# EAGLE board CarteMere_V2 (EAGLE 8.4.0)
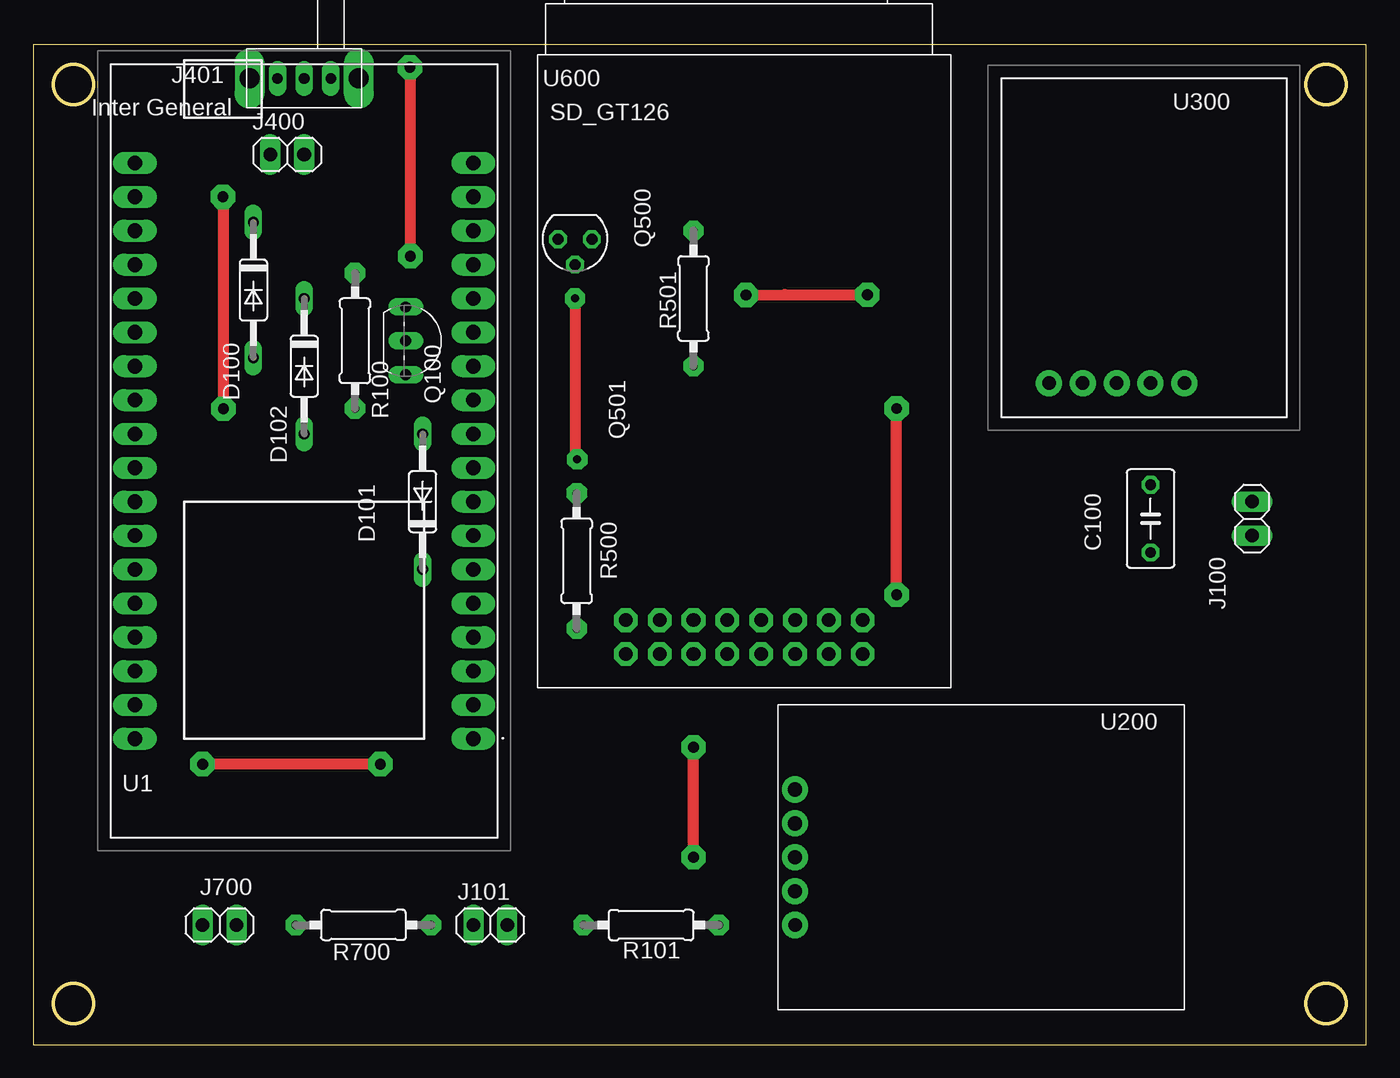
[diagram p0: board, top side]
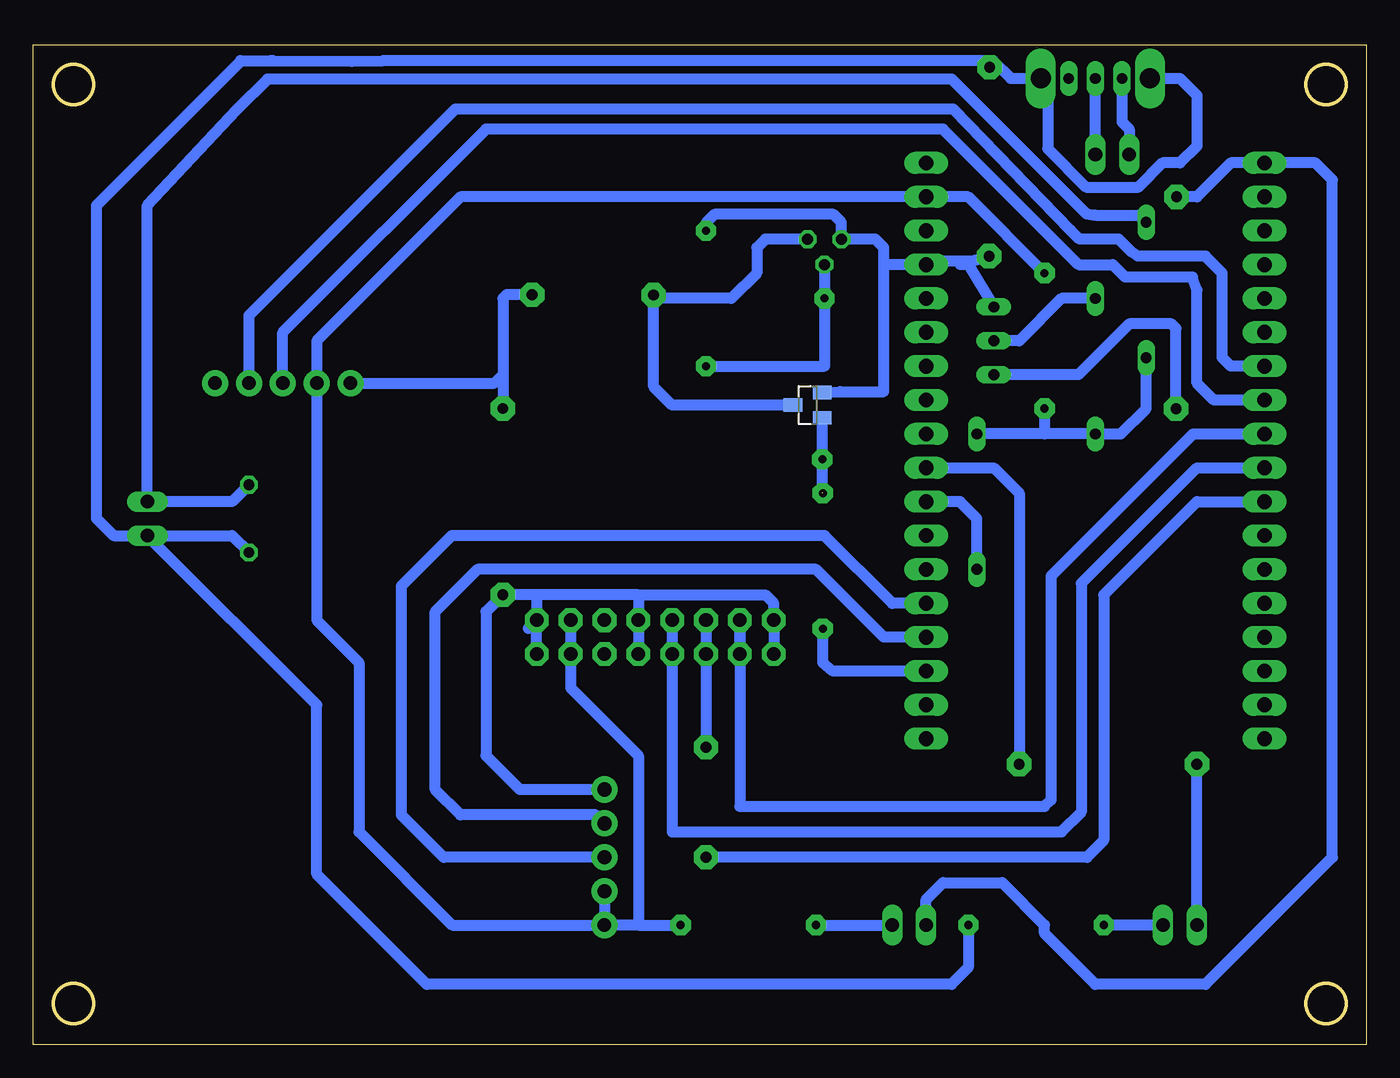
[diagram p1: board, bottom side, seen from below]

Size 100 x 75 mm. Coordinates in mm from the lower left corner, seen from the top.
Outline: 0,0 100,0 100,75 0,75 0,0
Outline: circle at 3,72 radius 1.5
Outline: circle at 97,72 radius 1.5
Outline: circle at 97,3.08 radius 1.5
Outline: circle at 3,3.08 radius 1.5
Copper layers (1*16): Top 0.035mm / dielectric 1.5mm / Bottom 0.035mm
Design rules "default *": minimum track width 20mil, minimum drill 0.35mm, track to track 20mil, track to pad 20mil, pad to pad 20mil, via to via 20mil, smd to smd 6mil, copper to edge 20mil, drill to drill 20mil, minimum pad ring 10mil, minimum via ring 8mil, stop-mask expansion 4mil, vias tented up to drill 0mil, thermal gap 10mil

## Footprints (pad centres in the part's own frame; a part is rotated, then mirrored left to right if it is on the bottom)
C050-035X075 = drill 0.813 octagon: 1 -2.54,0; 2 2.54,0
DO35-10 = drill 0.813 long: A 5.08,0; C -5.08,0
1X02 = drill 1.016 long: 1 -1.27,0; 2 1.27,0
COMMUTATEUR_GLISSIERE_1RT_100MA = drill 0.8 long: COM 0,0; OUTA 0,2; OUTB 0,-2 | drill 1.5 long: GNDA 0,4.1; GNDB 0,-4.1
TO92-EBC = drill 0.813 long: B 0,-1.27; C 2.54,-1.27; E -2.54,-1.27
SOT54E = drill 0.813 octagon: D -1.27,0; G 0,1.905; S 1.27,0
SOT23 = smd 1 x 1.4: 1 -0.95,-1.1; 2 0.95,-1.1; 3 0,1.1
0207/10 = drill 0.61 pad 1.524 octagon: 1 -5.08,0; 2 5.08,0
FIREBEETLE_ESP32 = drill 1.11 pad 1.651 long: 1 25.4,12.7; 2 22.86,12.7; 18 -17.78,12.7 | drill 1.11 pad 1.665 long: 3 20.32,12.7; 4 17.78,12.7; 5 15.24,12.7; 6 12.7,12.7; 7 10.16,12.7; 8 7.62,12.7; 9 5.08,12.7; 10 2.54,12.7; 11 0,12.7; 12 -2.54,12.7; 13 -5.08,12.7; 14 -7.62,12.7; 15 -10.16,12.7; 16 -12.7,12.7; 17 -15.24,12.7; 19 25.4,-12.7; 20 22.86,-12.7; 21 20.32,-12.7; 22 17.78,-12.7; 23 15.24,-12.7; 24 12.7,-12.7; 25 10.16,-12.7; 26 7.62,-12.7; 27 5.08,-12.7; 28 2.54,-12.7; 29 0,-12.7; 30 -2.54,-12.7; 31 -5.08,-12.7; 32 -7.62,-12.7; 33 -10.16,-12.7; 34 -12.7,-12.7; 35 -15.24,-12.7; 36 -17.78,-12.7
SPARKFUN_HX711_LOAD_CELL = drill 1.067 pad 1.956: CLK 29.21,8.89; DAT 29.21,11.43; GND 29.21,6.35; VCC 29.21,13.97 | drill 1.016 pad 1.956: VDD 29.21,16.51
ADA3295 = drill 1.016 pad 1.956: 1 0,0; 2 0,-2.54; 3 0,-5.08; 4 0,-7.62; 5 0,-10.16
SD_GT126 = drill 1.016 pad 1.778 octagon: 3V3@6 2.54,-6.35; 3V3@9 5.08,-6.35; 5V@5 2.54,-3.81; 5V@10 5.08,-3.81; CS@4 2.54,-1.27; CS@11 5.08,-1.27; GND@0 2.54,8.89; GND@7 2.54,-8.89; GND@8 5.08,-8.89; GND@15 5.08,8.89; MISO@1 2.54,6.35; MISO@14 5.08,6.35; MOSI@3 2.54,1.27; MOSI@12 5.08,1.27; SCK@2 2.54,3.81; SCK@13 5.08,3.81

## Placement (x,y rotation side)
C100  10n  [C050-035X075]  83.82,39.45 270 top
D100  1N4148  [DO35-10]  16.51,56.59 270 top
D101  1N4148  [DO35-10]  29.21,40.72 90 top
D102  1N4148  [DO35-10]  20.32,50.88 270 top
J100  Capteur ILS  [1X02]  91.44,39.45 90 top
J101  LED_CAPOT  [1X02]  34.29,8.97 180 top
J400  Inter batterie  [1X02]  19.05,66.75 0 top
J401  Inter General  [COMMUTATEUR_GLISSIERE_1RT_100MA]  20.32,72.47 90 top
J700  LED_PESEE  [1X02]  13.97,8.97 0 top
Q100  2N5551  [TO92-EBC]  29.21,52.78 270 top
Q500  BS170  [SOT54E]  40.64,60.41 180 top
Q501  SI2302DS  [SOT23]  41.91,47.96 90 bottom
R100  100k  [0207/10]  24.13,52.78 90 top
R101  470R  [0207/10]  46.35,8.97 0 top
R500  100R  [0207/10]  40.77,36.27 90 top
R501  1M  [0207/10]  49.53,55.96 270 top
R700  100R  [0207/10]  24.77,8.97 180 top
U1  FIREBEETLE-ESP32-DFR0478  [FIREBEETLE_ESP32]  20.32,48.34 270 top
U200  HX711  [SPARKFUN_HX711_LOAD_CELL]  86.36,25.48 180 top
U300  RTC_ADA-3295  [ADA3295]  76.2,49.61 90 top
U600  SD_GT126  [SD_GT126]  53.34,26.75 90 top

## Library data of the parts
C100 = rcl
D100-D102 = diode
J100 J101 J400 J700 = pinhead
J401 Q501 R100 R101 R500 R501 R700 U200 U600 = Eagle_UOF_Lib
Q100 = transistor-neu-to92
Q500 = transistor-small-signal
U1 = Eagle_UOF_Lib; DESCRIPTION: Development Boards & Kits - Wireless FireBeetle ESP32 IOT MCU; HEIGHT: mm; MANUFACTURER_NAME: DFRobot; MANUFACTURER_PART_NUMBER: DFR0478; MOUSER_PART_NUMBER: 426-DFR0478; MOUSER_PRICE-STOCK: https://www.mouser.co.uk/ProductDetail/DFRobot/DFR0478?qs=EU6FO9ffTwc%252BR65h2NUGQw%3D%3D
U300 = Eagle_UOF_Lib; DESCRIPTION: Real Time Clock module; HEIGHT: 3.5mm; MANUFACTURER_NAME: Adafruit; MANUFACTURER_PART_NUMBER: ADA-3295

## Nets
3V3: R100.2 R101.2 U1.17 U200.VCC U200.VDD U300.2 U600.3V3@6 U600.3V3@9
GND: C100.2 J100.1 J401.GNDA J401.GNDB Q100.E Q500.S Q501.2 R501.1 R700.1 U1.15
GND_C: Q500.D Q501.3 U200.GND U300.1 U600.CS@4 U600.CS@11 U600.GND@0 U600.GND@7 U600.GND@8 U600.GND@15
GND_C_EN: R500.1 U1.3
HX711_CLK: U1.4 U200.CLK
HX711_DAT: U1.5 U200.DAT
I2C_SCL: U1.30 U300.4
I2C_SDA: U1.29 U300.3
LED_CAPOT_PLUS: J101.1 R101.1
LED_PESEE: J700.1 U1.9
MASQUE_RESET_EN: D101.C U1.8
N$1: Q500.G Q501.1 R500.2 R501.2
N$2: J700.2 R700.2
N$5: D100.A D101.A D102.A R100.1
N$6: C100.1 D100.C J100.2
N$8: D102.C Q100.B
N$11: J400.2 J401.COM
N$13: J400.1 J401.OUTA
RESET: J101.2 Q100.C U1.36
SPI_MISO: U1.28 U600.MISO@1 U600.MISO@14
SPI_MOSI: U1.27 U600.MOSI@3 U600.MOSI@12
SPI_SCK: U1.26 U600.SCK@2 U600.SCK@13

## Tracks (layer width: path | path; a pad name or v marks a point on that pad's centre or on a via)
3V3
  Bottom 0.813: U200.VCC U200.VDD | U600.3V3@9 U600.3V3@6 59.69,26.75 54.61,21.67 54.61,8.97 | 54.61,8.97 55.24,8.97 | 54.61,8.97 R101.2 | 55.24,8.97 U200.VDD | R100.2 29.84,63.58 U1.17 67.94,63.58 78.74,52.78 U300.2 78.74,31.83 75.56,28.66 75.56,15.95 68.58,8.97 U200.VDD | 55.26,8.98 55.24,8.97
GND  (via drill 0.81 pad 1.83)
  Top 0.813: v28.29,59.14 28.29,72.12 v28.25,73.3
  Bottom 0.813: J100.1 93.98,38.18 95.25,39.45 95.25,62.94 84.45,73.74 84.45,73.79 82.16,73.79 82.03,73.8 76.1,73.75 73.74,73.79 28.57,73.79 | J401.GNDA 13.97,72.47 12.7,71.2 12.7,67.39 13.97,66.12 15.28,66.12 17.09,64.32 21.01,64.32 23.89,67.19 23.89,71.94 J401.GNDB 26.67,72.47 27.99,73.79 28.57,73.79 | J100.1 78.74,25.48 78.74,12.78 70.48,4.53 31.11,4.53 29.84,5.79 R700.1 | 27.94,59.14 v28.29,59.14 29.56,58.78 | C100.2 85.09,38.18 J100.1 | 29.56,58.78 30.48,58.5 29.84,58.5 Q100.E | v28.25,73.3 28.72,73.3 28.57,73.79 | U1.15 32.74,58.78 29.56,58.78 | U1.15 34.29,58.5 | Q501.2 39.47,48.98 36.2,48.98 36.2,58.5 | R501.1 49.53,61.62 48.9,62.26 39.95,62.26 39.37,61.67 Q500.S 36.83,60.41 36.2,59.77 36.2,58.5 | U1.15 36.2,58.5
GND_C  (via drill 0.8 pad 1.83, 0.81 pad 1.83)
  Top 0.813: v64.77,33.73 v64.77,47.7 | v53.47,56.21 56.36,56.24 v62.57,56.24
  Bottom 0.813: U600.GND@0 U600.GND@15 44.45,33.1 45.09,33.73 54.61,33.73 | U600.GND@7 U600.GND@8 | 54.61,33.73 62.23,33.73 | 62.23,33.73 U600.GND@8 | U600.GND@8 62.87,31.2 | U200.GND 63.5,19.13 66.04,21.67 66.04,32.47 v64.77,33.73 62.23,33.73 | U300.1 65.41,49.61 64.77,50.24 | 64.77,50.24 v64.77,47.7 | Q500.D 45.09,60.41 45.72,59.77 45.72,57.87 47.62,55.96 53.47,55.96 | 53.47,55.96 53.47,49.36 52.07,47.96 Q501.3 | 54.61,33.73 U600.CS@11 U600.CS@4 | 53.47,55.96 v53.47,56.21 | v62.57,56.24 64.49,56.24 64.77,55.96 64.77,50.24
GND_C_EN
  Bottom 0.813: R500.1 40.77,28.66 40.01,28.02 U1.3
HX711_CLK
  Bottom 0.813: U200.CLK 57.78,17.23 67.94,17.23 69.85,19.13 69.85,32.47 66.67,35.64 41.27,35.64 36.2,30.56 U1.4
HX711_DAT
  Bottom 0.813: U200.DAT 69.22,14.05 72.39,17.23 72.39,34.39 68.6,38.18 40.64,38.18 35.56,33.1 U1.5 32.44,33.1
I2C_SCL
  Bottom 0.813: U300.4 83.82,54.69 68.33,70.18 30.99,70.18 22.18,61.08 21.51,60.41 18.56,60.41 17.59,59.43 17.14,59.14 12.06,59.14 10.79,57.87 10.79,51.52 10.16,50.88 U1.30
I2C_SDA
  Bottom 0.813: U300.3 81.28,53.42 66.04,68.66 31.75,68.66 21.59,58.5 19.01,58.5 18.08,57.57 13.04,57.57 12.7,56.59 12.7,49.61 11.43,48.34 U1.29
LED_CAPOT_PLUS
  Bottom 0.813: R101.1 J101.1
LED_PESEE  (via drill 0.81 pad 1.83)
  Top 0.813: v26.04,21.04 v12.7,21.04
  Bottom 0.813: U1.9 27.94,43.26 26.04,41.35 v26.04,21.04 | J700.1 v12.7,21.04
MASQUE_RESET_EN
  Bottom 0.813: 29.21,35.01 D101.C 29.21,39.45 30.48,40.72 U1.8
N$1  (via drill 0.6 pad 1.52)  (1 unrouted)
  Top 0.813: v40.64,55.96 40.64,43.9 v40.81,43.9
  Bottom 0.813: 40.81,41.4 v40.81,43.9 Q501.1 | R501.2 40.64,50.88 v40.64,55.96 Q500.G
N$2
  Bottom 0.813: J700.2 R700.2
N$5
  Bottom 0.813: 24.13,45.8 D101.A | 24.13,45.8 D102.A 18.41,45.8 16.51,47.7 D100.A | R100.1 24.13,45.8
N$6
  Bottom 0.813: 30.68,71.99 | 30.68,71.99 31.09,72.41 82.44,72.41 84.69,70.15 91.44,62.94 J100.2 85.09,40.72 C100.1 | 30.68,71.99 20.99,62.31 20.33,62.22 17.05,62.22 D100.C
N$8
  Bottom 0.813: D102.C 22.86,55.96 26.04,52.78 Q100.B
N$11
  Bottom 0.813: J400.2 J401.COM
N$13
  Bottom 0.813: J401.OUTA 18.32,69.2 17.78,68.66 J400.1
RESET  (via drill 0.81 pad 1.83)
  Top 0.813: v14.26,47.69 14.26,63.24 v14.22,63.58
  Bottom 0.813: 33.02,7.95 J101.2 33.02,10.88 31.75,12.14 27.3,12.14 24.13,8.97 24.13,8.34 20.32,4.53 12.06,4.53 2.54,14.05 2.54,64.85 3.81,66.12 U1.36 10.16,66.12 12.7,63.58 v14.22,63.58 | Q100.C 21.59,50.24 17.78,54.05 14.61,54.05 14.26,53.71 v14.26,47.69
SPI_MISO
  Bottom 0.813: U600.MISO@1 U600.MISO@14 46.99,17.86 24.13,17.86 23.65,18.34 23.65,35.13 12.99,45.8 U1.28
SPI_MOSI
  Bottom 0.813: U600.MOSI@12 U600.MOSI@3 52.07,15.95 22.86,15.95 21.37,17.44 21.37,34.59 12.7,43.26 U1.27
SPI_SCK  (via drill 0.81 pad 1.83)
  Top 0.813: v49.53,14.05 v49.53,22.3
  Bottom 0.813: v49.53,22.3 U600.SCK@2 U600.SCK@13 | v49.53,14.05 20.95,14.05 19.68,15.32 19.68,33.73 12.7,40.72 U1.26